# EAGLE board Beefcake_Relay_Control_Kit (EAGLE 6.5.0)
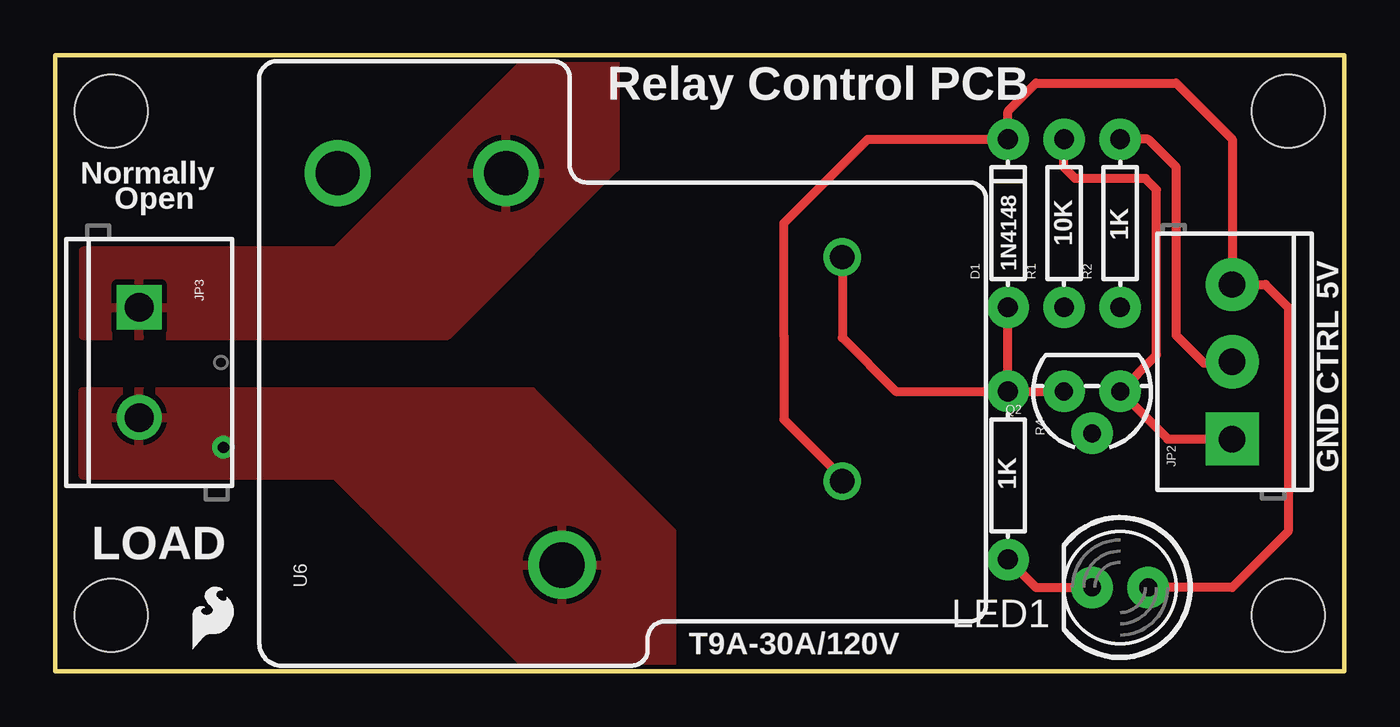
[diagram p0: board, top side]
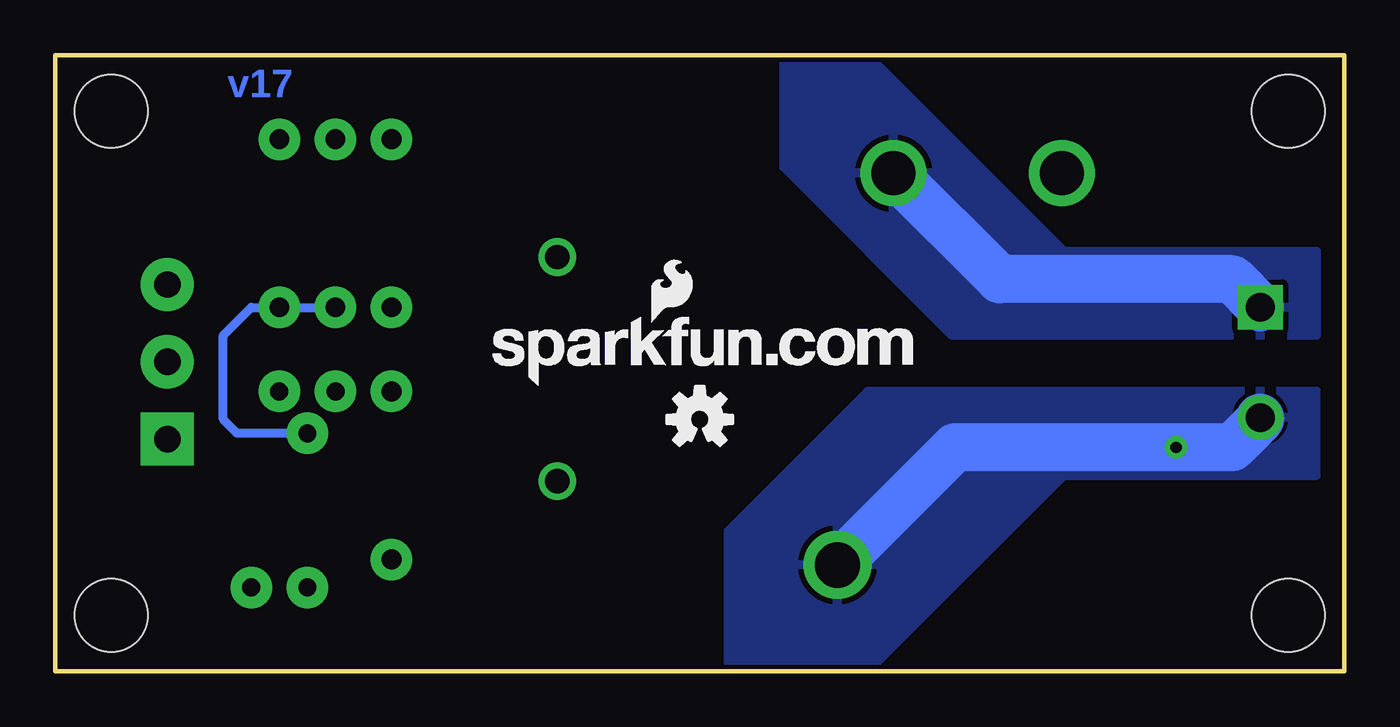
[diagram p1: board, bottom side, seen from below]

Size 58.42 x 27.94 mm. Coordinates in mm from the lower left corner, seen from the top.
Outline: 0,0 58.42,0 58.42,27.94 0,27.94 0,0
Copper layers (1*16): Top 0.035mm / dielectric 1.5mm / Bottom 0.035mm
Design rules "default": minimum track width 8mil, minimum drill 20mil, track to track 8mil, track to pad 8mil, pad to pad 8mil, via to via 8mil, smd to smd 8mil, copper to edge 8mil, drill to drill 8mil, minimum pad ring 12mil, minimum via ring 10mil, stop-mask expansion 4mil, vias tented up to drill 20mil, thermal gap 10mil

## Footprints (pad centres in the part's own frame; a part is rotated, then mirrored left to right if it is on the bottom)
DIODE-1N4148 = drill 0.9 pad 1.88: A -3.81,0; C 3.81,0
SCREWTERMINAL-3.5MM-3 = drill 1.2 pad 2.413 square: 1 0,0 | drill 1.2 pad 2.413: 2 3.5,0; 3 7,0
SCREWTERMINAL-5MM-2 = drill 1.3 pad 2.032 square: 1 0,0 | drill 1.3 pad 2.032: 2 5,0
LED5MM = drill 0.813 pad 1.88: A -1.27,0; K 1.27,0
TO-92 = drill 0.813 pad 1.88: 1 -1.27,0; 2 0,1.905; 3 1.27,0
AXIAL-0.3 = drill 0.9 pad 1.88: P$1 -3.81,0; P$2 3.81,0
RELAY-T9A-2 = drill 1.1: COIL1 -6.61,-10.27; COIL2 3.55,-10.27 | drill 2.057: MAIN -10.41,2.43 | drill 2: NC 7.35,12.6; NO 7.35,4.97
STAND-OFF = hole 3.302: 0,0

## Placement (x,y rotation side)
D1  1N4148  [DIODE-1N4148]  43.18,20.32 90 top
FRAME1  FRAME-LETTER  [CREATIVE_COMMONS]  -0.74,-8.89 0 top  (outside the outline)
JP2  [SCREWTERMINAL-3.5MM-3]  53.34,10.54 90 top
JP3  Load  [SCREWTERMINAL-5MM-2]  3.81,16.51 270 top
LED1  [LED5MM]  48.26,3.81 180 top
Q2  2N3904  [TO-92]  46.99,12.7 180 top
R1  10K  [AXIAL-0.3]  45.72,20.32 90 top
R2  1K  [AXIAL-0.3]  48.26,20.32 90 top
R4  1K  [AXIAL-0.3]  43.18,8.89 270 top
U6  RELAYPTH3  [RELAY-T9A-2]  25.4,15.24 90 top
U$1  LOGO-SFENEW  [SFE-NEW-WEBLOGO]  38.61,12.95 0 bottom
U$3  STAND-OFF  [STAND-OFF]  2.54,2.54 0 top
U$4  STAND-OFF  [STAND-OFF]  55.88,2.54 0 top
U$5  STAND-OFF  [STAND-OFF]  55.88,25.4 0 top
U$7  STAND-OFF  [STAND-OFF]  2.54,25.4 0 top
U$11  [SFE-LOGO-FLAME]  6.22,1.02 0 top
U$12  OSHW-LOGOS  [OSHW-LOGO-S]  29.21,11.43 0 bottom

## Library data of the parts
D1 JP2 JP3 LED1 Q2 R1 R2 R4 U6 U$1 U$3-U$5 U$7 U$11 U$12 = SparkFun
FRAME1 = SparkFun-Aesthetics

## Nets
COIL: D1.A Q2.3 R4.P$1 U6.COIL2
GND: JP2.1 Q2.1 R1.P$2
LOAD1: JP3.2 U6.MAIN
LOAD2: JP3.1 U6.NO
N$6: Q2.2 R1.P$1 R2.P$1
N$9: LED1.K R4.P$2
RAW: D1.C JP2.3 LED1.A U6.COIL1
RELAY: JP2.2 R2.P$2

## Tracks (layer width: path | path; a pad name or v marks a point on that pad's centre or on a via)
COIL
  Top 0.406: R4.P$1 D1.A | R4.P$1 Q2.3 | R4.P$1 38.1,12.7 35.67,15.13 U6.COIL2
GND
  Top 0.406: JP2.1 50.42,10.54 Q2.1 49.91,14.35 49.91,21.84 49.4,22.35 46.23,22.35 45.72,22.86 R1.P$2
LOAD1  (via drill 0.51)
  Bottom 2.184: JP3.2 3.81,11.43 5.08,10.16 v7.62,10.16 17.64,10.16 U6.MAIN
  pour Bottom: 1.27,12.7 21.59,12.7 27.94,6.35 27.94,0 21.59,0 12.7,8.89 1.27,8.89
  pour Top: 1.27,12.7 21.59,12.7 24.13,10.16 27.94,6.35 27.94,1.27 27.94,0 21.59,0 13.97,7.62 12.7,8.89 1.27,8.89
LOAD2
  Bottom 2.184: JP3.1 5.08,17.78 15.62,17.78 U6.NO
  pour Bottom: 1.27,15.24 16.51,15.24 17.78,15.24 25.4,22.86 25.4,27.94 21.59,27.94 12.7,19.05 1.27,19.05
  pour Top: 1.27,15.24 17.78,15.24 25.4,22.86 25.4,27.94 21.59,27.94 12.7,19.05 1.27,19.05
N$6
  Bottom 0.406: Q2.2 50.16,10.79 50.8,11.43 50.8,15.24 49.53,16.51 R2.P$1 R1.P$1
N$9
  Top 0.406: LED1.K 44.45,3.81 R4.P$2
RAW
  Top 0.406: LED1.A 53.34,3.81 55.88,6.35 55.88,16.51 54.85,17.54 JP2.3 53.34,24.13 50.8,26.67 44.45,26.67 43.18,25.4 D1.C 36.83,24.13 33.02,20.32 33.02,15.24 33.02,11.43 35.67,8.78 U6.COIL1
RELAY
  Top 0.406: R2.P$2 49.53,24.13 50.8,22.86 50.8,15.24 52.07,13.97 53.27,13.97 JP2.2

## Text on the board
Bottom: v17
tPlace: Relay Control PCB | Normally | Open | 5V | CTRL | GND | LOAD | T9A-30A/120V
tDocu: N. Seidle/Joel Bartlett